# EAGLE board 2016-07-08_01-20-50 (EAGLE 6.4)
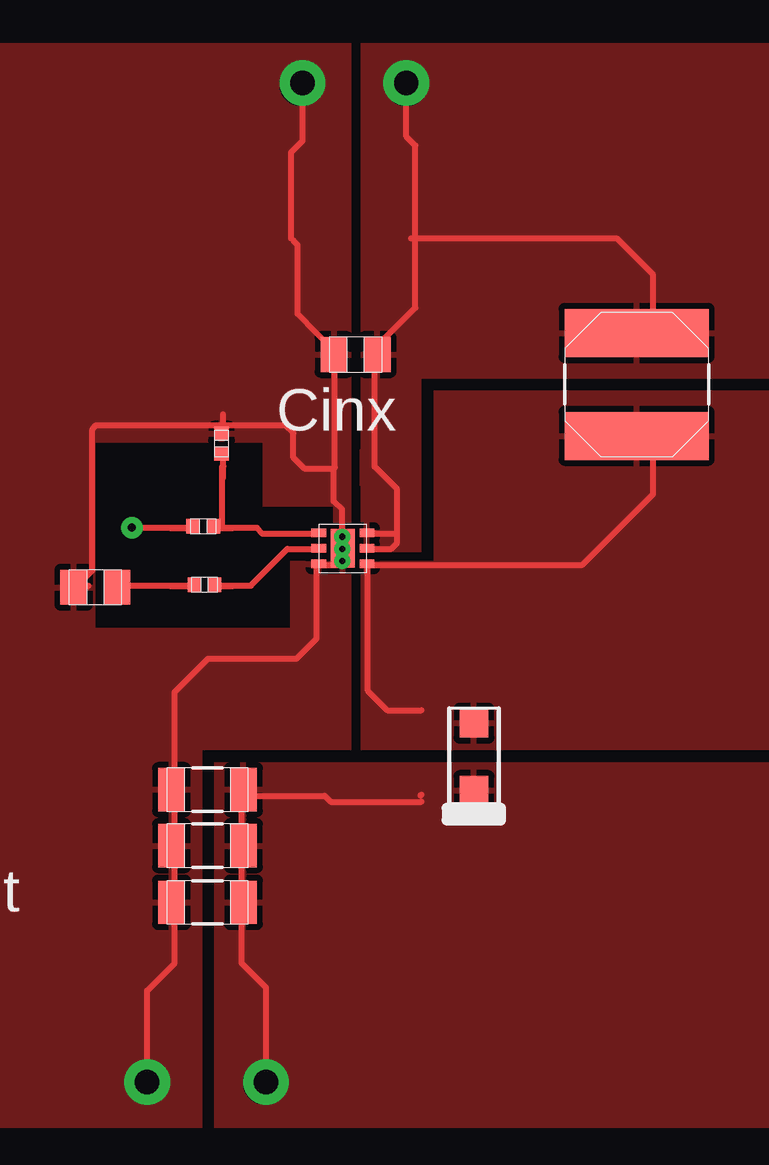
[diagram p0: board, top side]
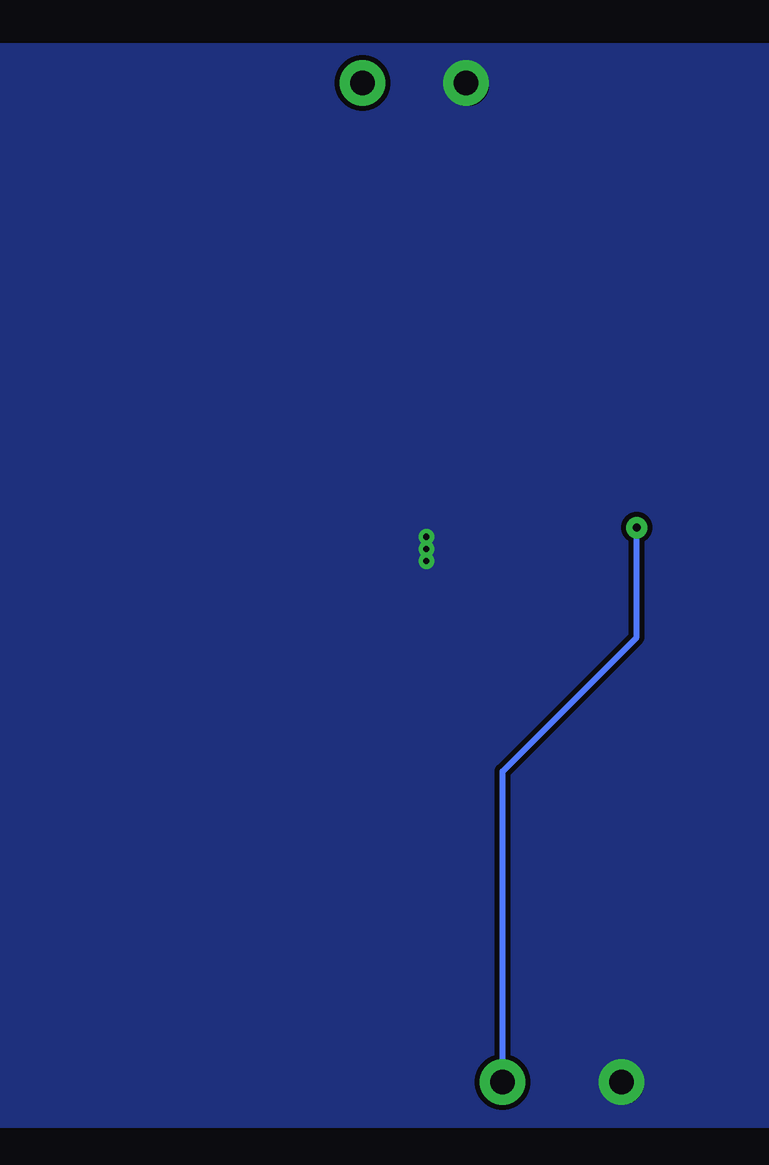
[diagram p1: board, bottom side, seen from below]

No outline drawn. Coordinates in mm, seen from the top.
Copper layers ((1*2)+(15*16)): TOP / INTERNAL1 / layer 15 / BOTTOM

## Footprints (pad centres in the part's own frame; a part is rotated, then mirrored left to right if it is on the bottom)
0805 = smd 1.118 x 1.448: 1 -0.902,0; 2 0.902,0
1206 = smd 1.118 x 1.803: 1 -1.499,0; 2 1.499,0
SOD-123F = smd 1.2 x 1.2: 1 -1.4,0; 2 1.4,0
TP-1502 = drill 0.813 round: 1 0,0
SRN6045 = smd 2 x 6: 1 -2.15,0; 2 2.15,0
0402 = smd 0.559 x 0.61: 1 -0.419,0; 2 0.419,0
S-PWSON-N6 = smd 0.61 x 0.356: 1 -1.003,0.65; 2 -1.003,0; 3 -1.003,-0.65; 4 1.003,-0.65; 5 1.003,0; 6 1.003,0.65 | smd 0.991 x 1.6: 7 0,0

## Placement (x,y rotation side)
Ccomp  [0805]  38.48,48.44 180 top
Cin  [0805]  49.33,58.14 180 top
Cout_1  [1206]  43.15,40.01 180 top
Cout_2  [1206]  43.15,37.67 180 top
Cout_3  [1206]  43.15,35.31 180 top
D1  [SOD-123F]  54.25,41.38 90 top
GND  [TP-1502]  47.07,69.42 270 top
GND1  [TP-1502]  40.61,27.79 270 top
L1  [SRN6045]  61.04,56.9 270 top
Rcomp  [0402]  43.03,48.54 0 top
Rfbb  [0402]  43.74,54.43 90 top
Rfbt  [0402]  42.98,50.98 0 top
U1  [S-PWSON-N6]  48.79,50.06 0 top
VIN  [TP-1502]  51.44,69.42 270 top
VOUT  [TP-1502]  45.54,27.79 270 top

## Library data of the parts
Ccomp = ultra-librarian; RefDes: Ccomp; Type: CC0805KRX7R9BB222
Cin = ultra-librarian; RefDes: Cin; Type: GRM21BR61E475MA12L
Cout_1-Cout_3 = ultra-librarian
D1 = ultra-librarian; RefDes: D1; Type: PMEG6010CEH,115
GND = ultra-librarian; RefDes: GND; Type: TP-1502
GND1 = ultra-librarian; RefDes: GND1; Type: TP-1502
L1 = ultra-librarian; RefDes: L1; Type: SRN6045-220M
Rcomp = ultra-librarian; RefDes: Rcomp; Type: CRCW040246K4FKED
Rfbb = ultra-librarian; RefDes: Rfbb; Type: CRCW040210K5FKED
Rfbt = ultra-librarian; RefDes: Rfbt; Type: CRCW0402226KFKED
U1 = ultra-librarian; RefDes: U1; Type: TPS61170DRVR
VIN = ultra-librarian; RefDes: VIN; Type: TP-1502
VOUT = ultra-librarian; RefDes: VOUT; Type: TP-1502

## Nets
0: Ccomp.2 Cin.2 Cout_1.2 Cout_2.2 Cout_3.2 GND1.1 GND.1 Rfbb.2 U1.3 U1.7
1: Ccomp.1 Rcomp.1
2: Cin.1 L1.1 U1.5 U1.6 VIN.1
3: Rfbb.1 Rfbt.2 U1.1
4: Cout_1.1 Cout_2.1 Cout_3.1 D1.1 Rfbt.1 VOUT.1
7: D1.2 L1.2 U1.4
8: Rcomp.2 U1.2

## Tracks (layer width: path | path; a pad name or v marks a point on that pad's centre or on a via)
0  (via drill 0.25 pad 0.51, 1.02 pad 1.91)
  TOP 0.254: 48.41,53.39 47.19,53.39 46.74,53.85 46.74,54.86 46.38,55.19 43.81,55.19 38.51,55.19 38.35,55.02 38.35,49.15 37.72,48.51 | 48.41,53.39 48.46,53.44 48.46,58.27 46.91,59.84 46.91,62.71 46.74,62.89 | 48.41,53.39 48.41,52.02 48.77,51.69 v48.77,49.53 48.62,49.38 47.7,49.38 47.7,46.3 46.86,45.47 43.18,45.47 41.78,44.07 41.78,32.77 40.64,31.62 v40.64,27.81 | 46.63,62.99 46.63,66.57 47.12,67.06 v47.12,69.47 | 37.26,48.5 38.2,48.5 | 43.8,54.71 43.8,55.65
  other vias: 48.77,50.55 48.77,50.04
  pour TOP (rank 6): 49.15,50.04 49.15,71.12 26.16,71.12 26.16,25.91 42.93,25.91 42.93,41.66 49.15,41.66 49.15,49.91 48.39,49.91 48.39,49.53 46.61,49.53 46.61,46.74 38.48,46.74 38.48,54.48 45.47,54.48 45.47,51.82 48.39,51.82 48.39,50.04
  pour BOTTOM (rank 5): 26.16,71.12 26.16,25.91 73.41,25.91 73.41,71.12
1
  TOP 0.254: 38.99,48.51 39.45,48.51 42.06,48.51 42.55,48.51 | 41.58,48.5 42.52,48.5 | 38.96,48.5 39.9,48.5
2  (via drill 1.02 pad 1.91)
  TOP 0.254: 49.84,50.04 50.8,50.04 51.05,50.29 51.05,52.53 50.11,53.47 50.11,58.42 51.82,60.1 51.82,66.85 51.44,67.23 v51.44,69.47 | 49.84,50.67 50.93,50.67 | 61.72,58.75 61.72,61.47 60.2,62.99 51.64,62.99
  pour TOP: 49.5,52.68 49.5,54.18 50.8,54.18 50.8,52.68
  pour TOP (rank 2): 73.41,57.15 73.41,71.12 49.53,71.12 49.53,49.91 52.07,49.91 52.07,57.15
3
  TOP 0.254: 43.76,50.93 43.76,53.47 43.81,53.49 43.81,53.98 | 43.76,50.93 45.21,50.93 45.44,50.67 47.7,50.67 | 43.31,50.93 43.76,50.93 | 43.28,50.91 44.22,50.91 | 43.8,53.01 43.8,53.95
4  (via drill 0.33 pad 0.89, 1.02 pad 1.91)
  TOP 0.254: v45.59,27.81 45.59,31.75 44.58,32.77 44.58,39.75 | 52.02,39.75 52.07,39.8 | v40.01,50.93 42.06,50.93 42.55,50.93 | 52.07,39.5 48.28,39.5 48.03,39.75 44.58,39.75 | 44.53,39.75 44.58,39.75 | 41.58,50.91 42.52,50.91
  BOTTOM 0.254: v45.59,27.81 45.59,40.77 40.01,46.35 v40.01,50.93
  pour TOP (rank 3): 43.43,25.91 73.41,25.91 73.41,41.15 43.43,41.15
7
  TOP 0.254: 61.72,54.79 61.72,52.32 58.78,49.38 49.84,49.38 49.84,44.12 50.65,43.31 52.07,43.31
  pour TOP (rank 4): 73.41,41.66 73.41,56.64 52.58,56.64 52.58,49.53 49.53,49.53 49.53,41.66
8
  TOP 0.254: 47.7,50.04 46.48,50.04 44.96,48.51 43.76,48.51 43.31,48.51 | 43.28,48.5 44.22,48.5

## Text on the board
ASSYNOTES: Cinx | Cout